# EAGLE board hbridge (EAGLE 7.6.0)
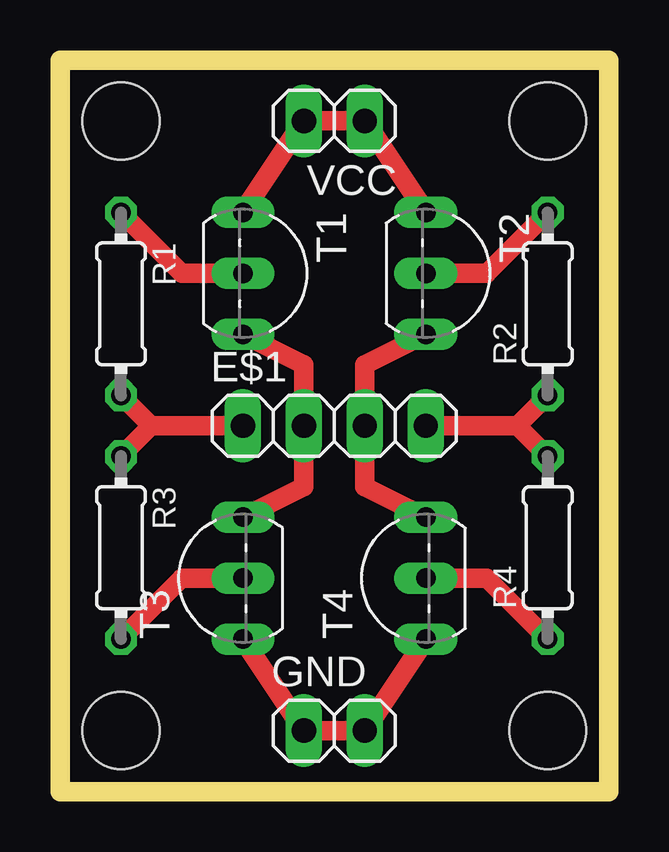
[diagram p0: board, top side]

Size 22.86 x 30.48 mm. Coordinates in mm from the lower left corner, seen from the top.
Outline: 0,30.48 22.86,30.48 22.86,0 0,0 0,30.48
Copper layers (1*16): Top 0.035mm / dielectric 1.5mm / Bottom 0.035mm
Design rules "default": minimum track width 10mil, minimum drill 24mil, track to track 8mil, track to pad 8mil, pad to pad 8mil, via to via 8mil, smd to smd 8mil, copper to edge 40mil, drill to drill 8mil, minimum pad ring 10mil, minimum via ring 8mil, stop-mask expansion 4mil, vias tented up to drill 0mil, thermal gap 10mil
Holes 3.2 mm at 2.54,2.54 20.32,2.54 20.32,27.94 2.54,27.94

## Footprints (pad centres in the part's own frame; a part is rotated, then mirrored left to right if it is on the bottom)
1X04 = drill 1.016 long: 1 -3.81,0; 2 -1.27,0; 3 1.27,0; 4 3.81,0
1X02 = drill 1.016 long: 1 -1.27,0; 2 1.27,0
0204/7 = drill 0.813 octagon: 1 -3.81,0; 2 3.81,0
TO92-EBC = drill 0.813 long: B 0,-1.27; C 2.54,-1.27; E -2.54,-1.27

## Placement (x,y rotation side)
E$1  [1X04]  11.43,15.24 0 top
GND  [1X02]  11.43,2.54 0 top
R1  [0204/7]  2.54,20.32 270 top
R2  [0204/7]  20.32,20.32 90 top
R3  [0204/7]  2.54,10.16 270 top
R4  [0204/7]  20.32,10.16 90 top
T1  [TO92-EBC]  8.89,21.59 270 top
T2  [TO92-EBC]  16.51,21.59 270 top
T3  [TO92-EBC]  6.35,8.89 90 top
T4  [TO92-EBC]  13.97,8.89 90 top
VCC  [1X02]  11.43,27.94 180 top

## Library data of the parts
E$1 GND VCC = pinhead
R1-R4 = resistor
T1-T4 = transistor

## Nets
S$1: E$1.2 T1.C T3.C
S$2: E$1.3 T2.C T4.C
S$3: E$1.1 R1.2 R3.1
S$4: E$1.4 R2.1 R4.2
S$5: R3.2 T3.B
S$6: R4.1 T4.B
S$7: R2.2 T2.B
S$8: R1.1 T1.B
S$9: GND.1 GND.2 T3.E T4.E
S$10: T1.E T2.E VCC.1 VCC.2

## Tracks (layer width: path | path; a pad name or v marks a point on that pad's centre or on a via)
S$1
  Top 0.813: T3.C 10.16,12.7 E$1.2 10.16,17.78 T1.C
S$2
  Top 0.813: T2.C 12.7,17.78 E$1.3 12.7,12.7 T4.C
S$3
  Top 0.813: R1.2 3.81,15.24 | 3.81,15.24 E$1.1 | R3.1 3.81,15.24
S$4
  Top 0.813: R2.1 19.05,15.24 | 19.05,15.24 E$1.4 | R4.2 19.05,15.24
S$5
  Top 0.813: R3.2 5.08,8.89 T3.B
S$6
  Top 0.813: R4.1 17.78,8.89 T4.B
S$7
  Top 0.813: R2.2 17.78,21.59 T2.B
S$8
  Top 0.813: R1.1 5.08,21.59 T1.B
S$9
  Top 0.813: T4.E GND.2 GND.1 T3.E
S$10
  Top 0.813: T1.E VCC.2 VCC.1 T2.E